# Altium PCB 7Seg LED Display Driver.PcbDoc
Units mm, origin at the board's own origin, x right, y up, seen from the top; angles counter-clockwise.
Board outline 152.4 x 101.6 mm, 2 copper layers (Top Layer, Bottom Layer); 17 components, 33 nets, 86 pads, 9 vias.
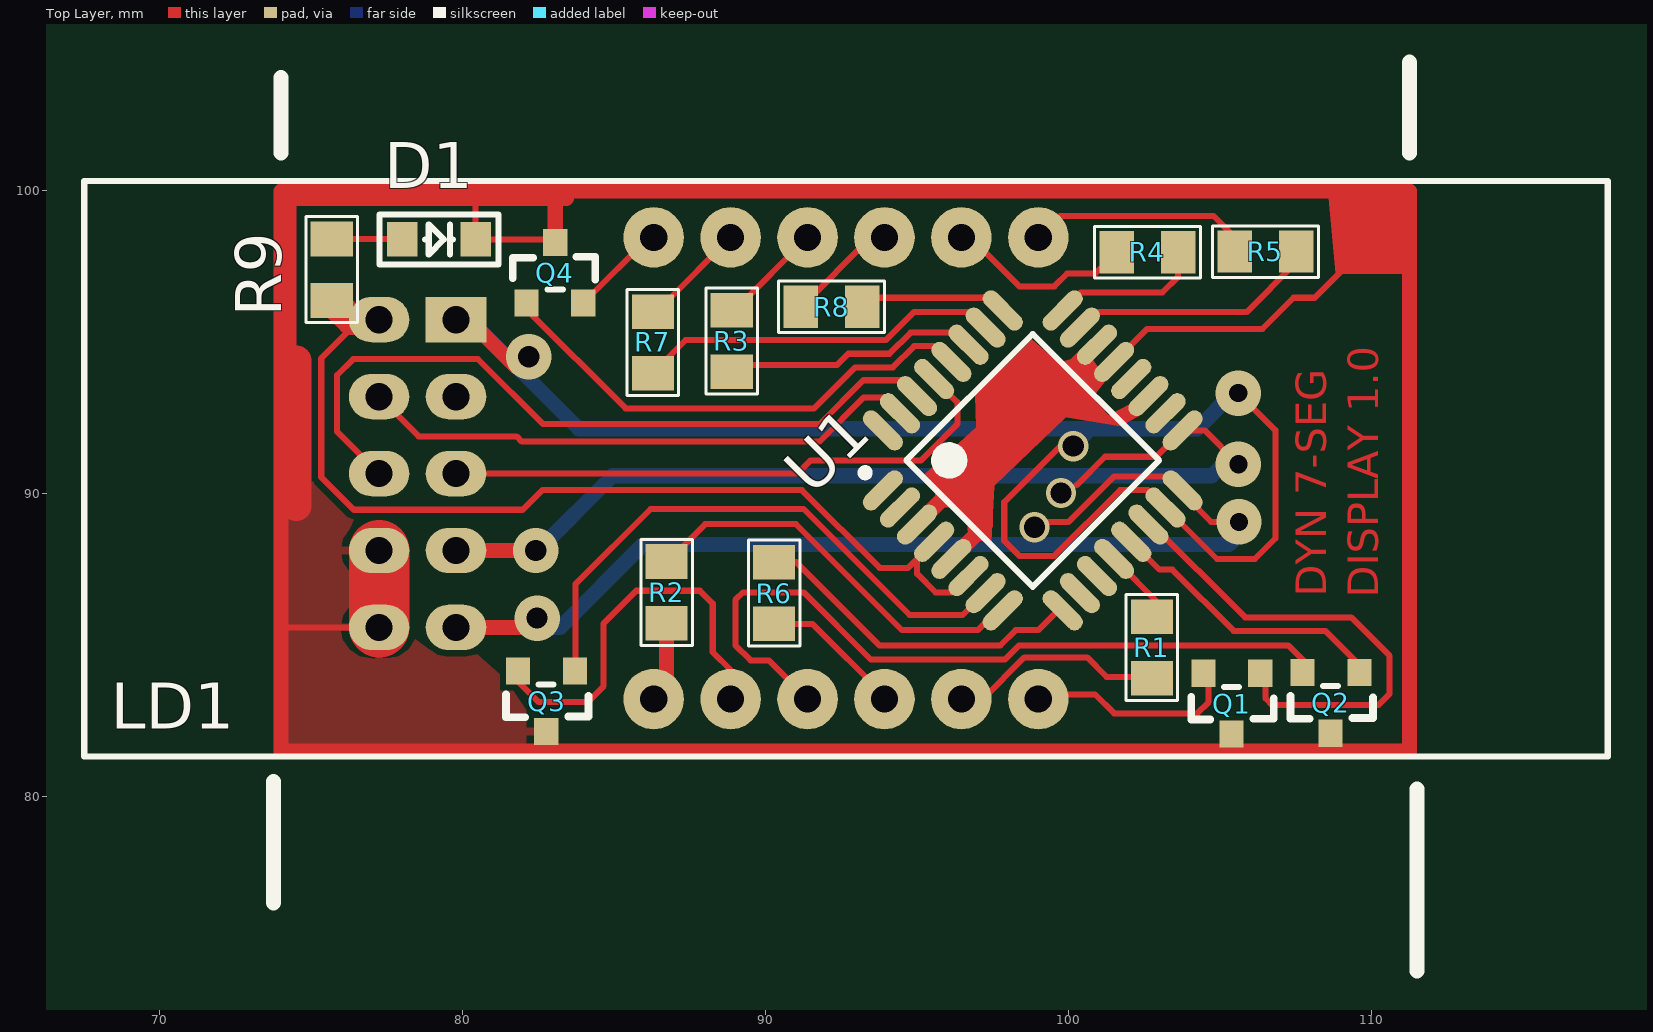
[diagram p0: Top Layer view]
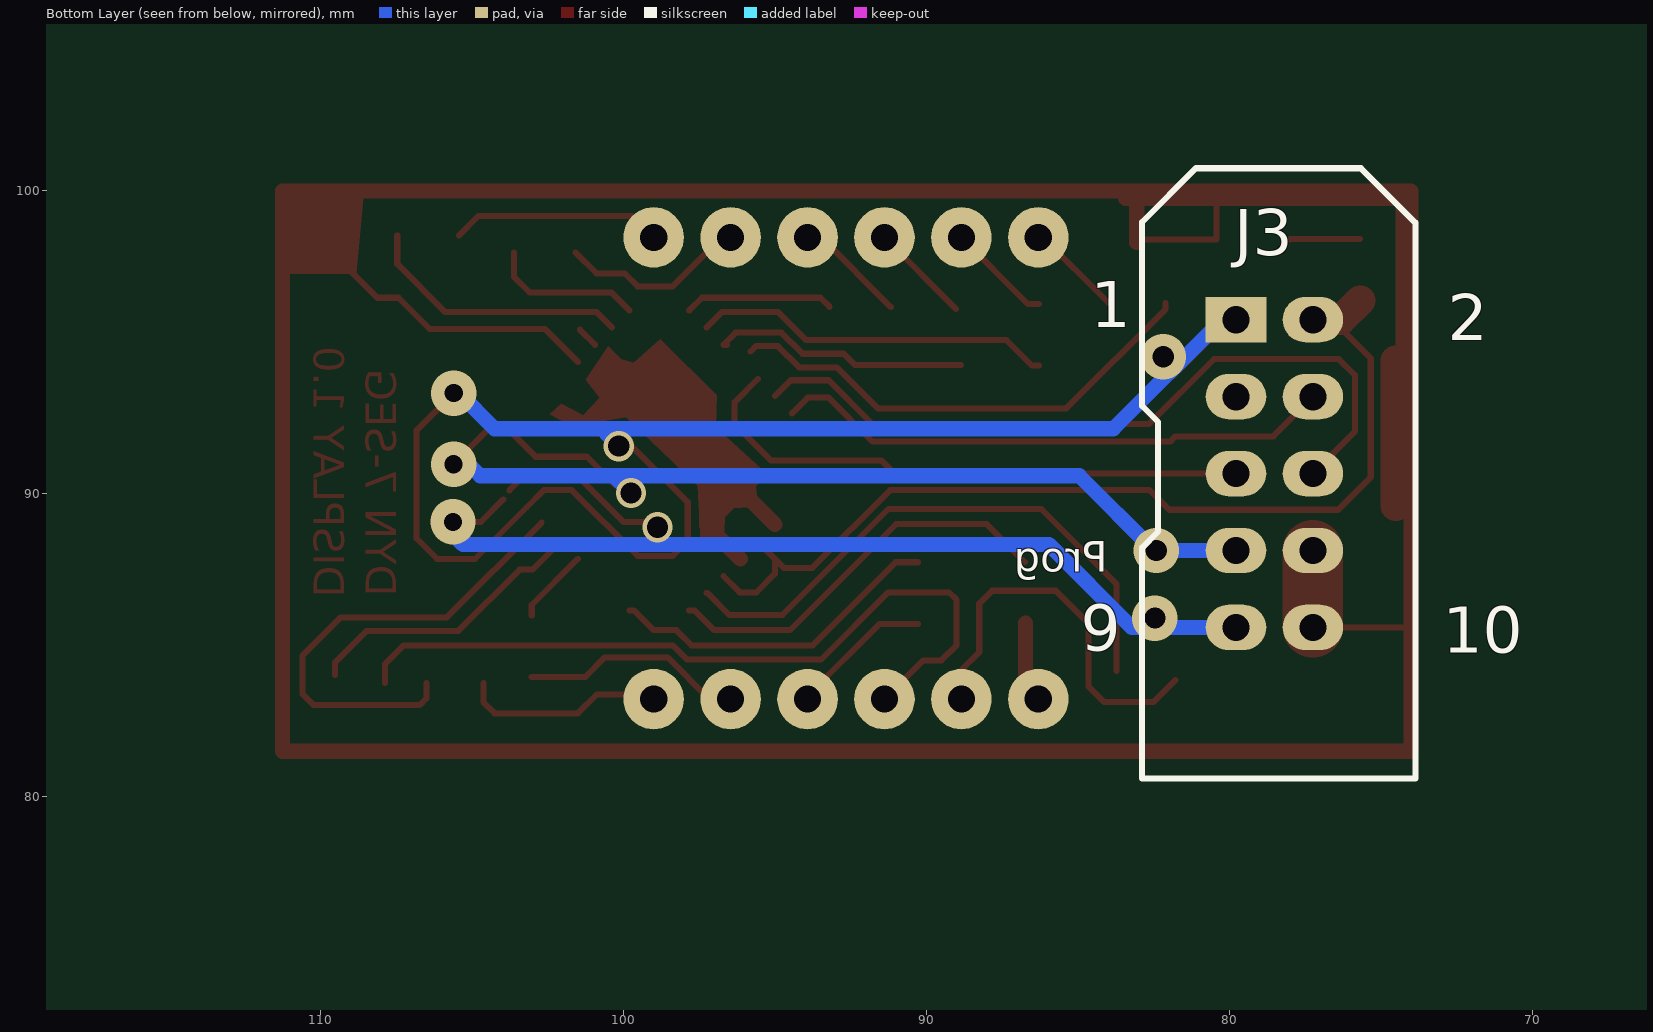
[diagram p1: Bottom Layer view, seen from below]
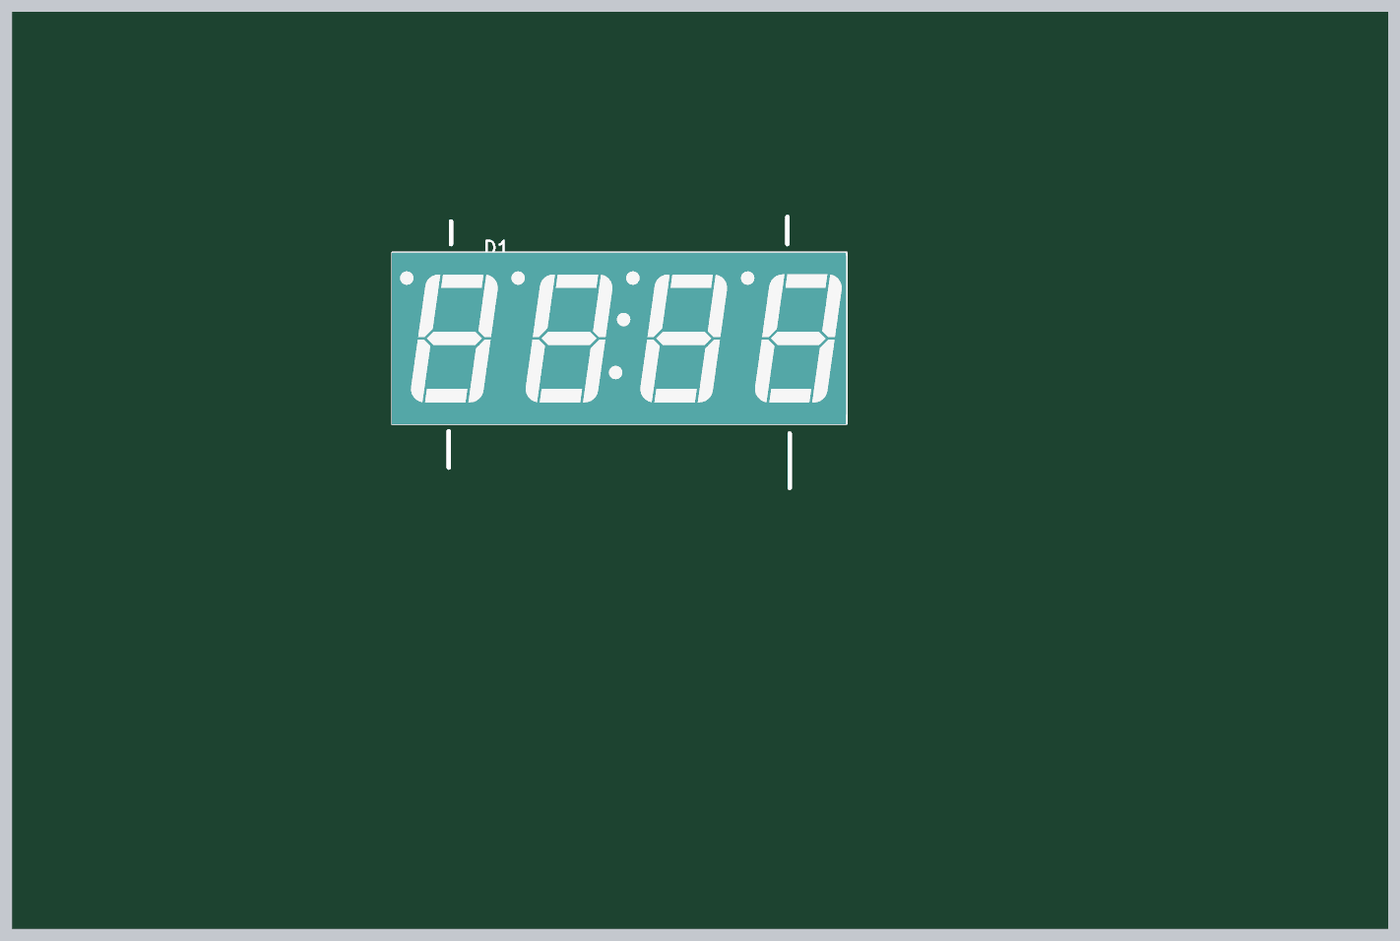
[diagram p2: 3D render of the assembled board from above, using the file's embedded part models]

## Layer stack, top to bottom
Top Solder: solder mask 0.0102, Solder Resist, Dk 3.5
Top Layer: signal copper 0.0356
Dielectric 1: dielectric 0.32, FR-4, Dk 4.8
Bottom Layer: signal copper 0.0356
Bottom Solder: solder mask 0.0102, Solder Resist, Dk 3.5

## Board outline
25.4,25.4 177.8,25.4 177.8,127 25.4,127

## Design rules (kind name [scope] priority, off if disabled: settings)
Clearance [All] p1: gap=0.2
ComponentClearance ComponentClearance_1 [InComponent('LD1') vs InComponent('J1')] p1: gap=0 collisioncheckmode=3 verticalgap=0 showdistances=FALSE
ComponentClearance [All] p2 off: gap=0.2 collisioncheckmode=3 verticalgap=0.2 showdistances=FALSE
PolygonConnect [All] p1: connectstyle=Relief reliefconductorwidth=0.254 reliefentries=4 polygonreliefangle="90 Angle" airgapwidth=0.254
RoutingCorners [All] p1: cornerstyle=45-Degree minsetback=0.1 maxsetback=0.1
RoutingVias [All] p1: holewidth=0.711 width=1.27 viastyle="Through Hole" minholewidth=0.711 minwidth=1.27 maxholewidth=0.711 maxwidth=1.27
SolderMaskExpansion [All] p1: expansion=0.102
Width [All] p1: maxlimit=2 minlimit=0.2 preferedwidth=0.5
27 further rules are at their usual default settings.

## Components (designator, comment, footprint, x,y, rotation, side; value= is the part's Value field where it differs from the comment)
D1 "Green" "LED SMD 0805 Green" 78,98.4 r0 top
J3 "IDC10 M" "LINE 2.54 x 10D (2 x 5) - BH" 79.775,95.75 r180 bottom
LD1 "Name" "7 seg, Dyn, 4 Digit" 99,83.225 r180 top
Q1 "BSS138" SOT-23 106.325,84.075 r180 top
Q2 "BSS138" SOT-23 109.6,84.1 r180 top
Q3 "BSS138" SOT-23 83.7,84.15 r180 top
Q4 "BSS138" SOT-23 82.1,96.3 r0 top
R1 ">100 Om" "SMD 0805 (2012)" 102.725,85.95 r270 top
R2 ">100 Om" "SMD 0805 (2012)" 86.7,87.775 r270 top
R3 ">100 Om" "SMD 0805 (2012)" 88.9,94.025 r90 top
R4 ">100 Om" "SMD 0805 (2012)" 103.625,98 r180 top
R5 ">100 Om" "SMD 0805 (2012)" 107.525,98.025 r180 top
R6 ">100 Om" "SMD 0805 (2012)" 90.25,87.75 r270 top
R7 ">100 Om" "SMD 0805 (2012)" 86.3,93.975 r90 top
R8 ">100 Om" "SMD 0805 (2012)" 93.2,96.2 r180 top
R9 "2.2k Om" "SMD 0805 (2012)" 75.7,96.375 r90 top
U1 "ATmega8A-AU" 32A_N 98.815,91.105 r45 top

## Footprints (in the part's own frame and the unit in brackets; to place one, negate y for a bottom-side part, rotate by r counter-clockwise, add the part's x,y. Pads: shape width x height; smd on the part's side, far side on the other; paste and mask are expansions set on the pad)
"7 seg, Dyn, 4 Digit" [mm] "7 Seg, 3 Digits, Dynamic"
  round 2 hole 0.9: A(2.54,0) B(12.7,0) C(7.62,-15.24) D(2.54,-15.24) D1(0,0) D2(7.62,0) D3(10.16,0) D4(12.7,-15.24) DP(5.08,-15.24) E(0,-15.24) F(5.08,0) G(10.16,-15.24)
  silkscreen extent -18.8,-17.1 31.5,1.9, body extent -18.77,-17.07 31.53,1.93, height 8
32A_N [mm] "Thin QFP, 32-Leads, Body 7x7mm, Pitch 0.8mm, IPC Medium Density"
  oval 1.65x0.55 smd: 1(-4.2,2.8) 2(-4.2,2) 3(-4.2,1.2) 4(-4.2,0.4) 5(-4.2,-0.4) 6(-4.2,-1.2) 7(-4.2,-2) 8(-4.2,-2.8) 17(4.2,-2.8) 18(4.2,-2) 19(4.2,-1.2) 20(4.2,-0.4) 21(4.2,0.4) 22(4.2,1.2) 23(4.2,2) 24(4.2,2.8)
  oval 0.55x1.65 smd: 9(-2.8,-4.2) 10(-2,-4.2) 11(-1.2,-4.2) 12(-0.4,-4.2) 13(0.4,-4.2) 14(1.2,-4.2) 15(2,-4.2) 16(2.8,-4.2) 25(2.8,4.2) 26(2,4.2) 27(1.2,4.2) 28(0.4,4.2) 29(-0.4,4.2) 30(-1.2,4.2) 31(-2,4.2) 32(-2.8,4.2)
  silkscreen extent -4.32,-2.95 2.95,3.75, body extent -3.5,-3.5 3.5,3.5, height 1.2
"LED SMD 0805 Green" [mm]
  rect 1x1.143 smd: A(0,0) K(2.425,0)
  silkscreen extent -0.75,-0.82 3.17,0.83, body extent 0.22,-0.62 2.24,0.63, height 1.1
"LINE 2.54 x 10D (2 x 5) - BH" [mm]
  rect 2x1.5 hole 0.9: 1(0,0)
  oval 2x1.5 hole 0.9: 2(2.54,0) 3(0,-2.54) 4(2.54,-2.54) 5(0,-5.08) 6(2.54,-5.08) 7(0,-7.62) 8(2.54,-7.62) 9(0,-10.16) 10(2.54,-10.16)
  silkscreen extent -3.1,-15.15 5.92,5, body extent -3.18,-15.25 6.02,5.11, height 8.84
"SMD 0805 (2012)" [mil]
  rect 45x55 smd: 1(0.35,0.98) 2(80.35,0.98)
  silkscreen extent -29,-32 109,34, body extent 1,-24 80,26, height 18
SOT-23 [mm]
  rect 0.8x0.9 smd: 1(0,0) 2(1.875,0) 3(0.95,2)
  silkscreen extent -0.45,0.45 2.27,1.53, body extent -0.57,-0.32 2.43,2.32, height 1.08

## Part data
D1: library part "Led SMD 0805 Green", "?2v ?20mA"
J3: library part "PLD-10 (2 x 5)", "Vert, Dbl line, Male"
LD1: library part "7 Seg, 4 dig, Dynamic", "Dynamic Common Catode/Anode 4 Digits Display"
Q1 Q2 Q3 Q4: "N-Channel 50V - 0.7-1? - 0.22A"
R1 R2 R3 R4 R5 R6 R7 R8 R9: library part "Res All Types"
U1: "8-bit AVR Microcontroller, 8KB Flash, 512 Bytes EEPROM, 1KB SRAM, 32-pin TQFP, Industrial Grade (-40°C to 85°C)"

## Via types
v1: diameter 1, hole 0.7, Top Layer to Bottom Layer, 3 vias
v2: diameter 1.5, hole 0.7, Top Layer to Bottom Layer, 3 vias
v3: diameter 1.5, hole 0.6, Top Layer to Bottom Layer, 3 vias

## Nets (pads, with @x,y where several pads share a name; then routed paths per layer and width w, separated by ;. In a path a pad name is that pad's centre, name@x,y a point inside that pad or via, vN(x,y) a via of type N, cw(c..) or ccw(c..) an arc to the next point about the centre after c; other vN are vias at no path point)
A: LD1.A R1.2 | length 7.7
  Top Layer w0.2: LD1.A@96.025,83.225 LD1.A@96.025,83.475 ; LD1.A 97.162,83.225 98.537,84.6 100.609,84.6 101.25,83.959 R1.2@103.025,83.959
B: LD1.B R2.2 | length 2.7
  Top Layer w0.5: LD1.B 86.725,83.65 R2.2
C: LD1.C R3.2 | length 3.3
  Top Layer w0.2: R3.2@89.015,96.1 LD1.C
D: LD1.D R4.2 | length 6.2
  Top Layer w0.2: LD1.D@96.5,98.5 96.725,98.5 98.375,96.85 99.525,96.85 99.95,97.275 100.884,97.275 R4.2
D1: LD1.D1 Q1.2 | length 6.5
  Top Layer w0.2: LD1.D1@99.15,83.375 100.875,83.375 101.5,82.75 104.25,82.75 104.625,83.125 Q1.2@104.625,83.75
D2: LD1.D2 Q2.2 | length 25.6
  Top Layer w0.2: LD1.D2 90.105,84.5 89.5,84.5 89,85 89,86.5 89.25,86.75 91.25,86.75 93.475,84.525 97.896,84.525 98.371,85 107.25,85 107.875,84.375 Q2.2@107.875,83.75
D3: LD1.D3 Q3.2 | length 13.1
  Top Layer w0.2: Q3.2@81.775,83.85 82.5,83.125 84.125,83.125 84.65,83.65 84.65,85.725 85.725,86.8 87.825,86.8 88.25,86.375 88.25,84.775 88.84,84.185 LD1.D3
D4: LD1.D4 Q4.2 | length 3.4
  Top Layer w0.2: Q4.2 86.2,98.525 86.2,98.365 LD1.D4
DON1: Q1.1 U1.14 | length 15.8
  Top Layer w0.2: U1.14@102.7,89.05 105.825,85.925 109.325,85.925 110.6,84.65 110.6,83.4 110.225,83.025 106.725,83.025 106.5,83.25 Q1.1@106.5,83.75
DON2: Q2.1 U1.13 | length 9.5
  Top Layer w0.2: U1.13@102.075,88.425 103,87.5 103.425,87.5 105.45,85.475 108.475,85.475 109.525,84.425 Q2.1@109.525,84.025
DON3: Q3.1 U1.7 | length 19.2
  Top Layer w0.2: Q3.1@83.725,84.15 83.725,87.025 86.2,89.5 91.25,89.5 94.75,86 96.5,86 97.221,86.721 U1.7
DON4: Q4.1 U1.28 | length 16.2
  Top Layer w0.2: Q4.1 82.1,96.1 85.375,92.825 91.6,92.825 92.95,94.175 94.2,94.175 94.9,94.875 95.625,94.875 U1.28@95.8,94.7
DP: LD1.DP R8.2 | length 3.2
  Top Layer w0.2: R8.2@91.167,96.167 LD1.DP@93.465,98.465
E: LD1.E R5.2 | length 7
  Top Layer w0.2: LD1.E 99.71,99.175 104.784,99.175 R5.2@105.434,98.525
F: LD1.F R6.2 | length 4.7
  Top Layer w0.2: R6.2 91.541,85.709 93.92,83.33 LD1.F
G: LD1.G R7.2 | length 3.5
  Top Layer w0.2: R7.2@86.275,96.266 86.641,96.266 LD1.G
GND: D1.K J3.8 J3.10 Q1.3 Q2.3 Q3.3 Q4.3 U1.3 U1.5 U1.19 U1.21 U1.22 | length 159
  Top Layer w0.2: 74.11,85.59 J3.10 ; 80.425,99.725 D1.K Q4.3@82.95,98.4 ; U1.3@94.984,88.984 U1.3 ; U1.22 U1.22@101.438,95.425 ; U1.21 102.594,95.45 106.4,95.45 107.425,96.475 108.125,96.475 109.625,97.975 111.1,97.975
  Top Layer w0.5: 74,99.875 74,100 ; 74.25,94.2 74.25,99.75 83.425,99.75 ; Q4.3 83.05,99.725 ; U1.3 96.088,90.075 96.725,90.075 97.25,89.55 97.25,88.974 U1.5 ; 74,100 111.25,100 111.25,81.5 74,81.5 74,100
  Top Layer w1: 74.5,89.6 74.5,94.4
  Top Layer w2: J3.10 J3.8
MISO: J3.9 U1.16 | length 37
  Top Layer w0.2: v1@98.725,89.075 99.35,89.075 100,89.075 101.5,90.575 103.305,90.575 U1.16 ; U1.16@103.96,89.815 104.7,89.075 v3(105.625,89.075)
  Top Layer w0.5: J3.9 v2@81.86,85.59
  Bottom Layer w0.5: J3.9 83.215,85.59 85.95,88.325 105.3,88.325 v3@105.6,88.625
  other v1: 98.875,88.9
  other v2: 82.45,85.9
MOSI: J3.1 U1.15 | length 51.3
  Top Layer w0.2: v1(100.15,91.575) 99.725,91.575 97.875,89.725 97.875,88.45 98.375,87.95 99.525,87.95 101.7,90.125 102.623,90.125 U1.15 104.898,87.85 106.15,87.85 106.825,88.525 106.825,92.1 v3(105.6,93.325)
  Top Layer w0.5: J3.1@80.2,95.75 v2@81.737,94.212
  Bottom Layer w0.5: J3.1 80.225,95.75 83.825,92.15 104.25,92.15 v3@105.425,93.325 ; v1(100.15,91.575) 100.55,91.975
  other v2: 82.175,94.525
NetD1_A: D1.A R9.2 | length 2.3
  Top Layer w0.2: R9.2 77.984,98.416 D1.A
RESET: J3.5 U1.29 | length 19
  Top Layer w0.2: J3.5 91.045,90.67 91.475,91.1 95.125,91.1 96.325,92.3 96.325,93.029 U1.29
RXD: J3.6 U1.30 | length 24.9
  Top Layer w0.2: J3.6 75.85,92.055 75.85,93.925 76.375,94.45 80.5,94.45 82.65,92.3 91.775,92.3 93.225,93.75 94.473,93.75 U1.30
SCK: J3.7 U1.17 | length 37
  Top Layer w0.2: 100.263,90.288 101.2,91.225 102.895,91.225 U1.17 104.49,92.095 v3(105.605,90.979)
  Top Layer w0.5: J3.7 v2(82.405,88.13)
  Bottom Layer w0.5: J3.7 82.48,88.13 84.95,90.6 100.3,90.6 ; v1(99.75,90.025) 100.325,90.6 104.725,90.6 105.104,90.979 v3(105.605,90.979)
SEGA: R1.1 U1.12 | length 2.5
  Top Layer w0.2: U1.12 103.025,86.329 R1.1@103.025,85.991
SEGB: R2.1 U1.8 | length 13.3
  Top Layer w0.2: R2.1@86.746,87.745 88,89 91,89 94.5,85.5 97,85.5 97.655,86.155 U1.8
SEGC: R3.1 U1.27 | length 8.6
  Top Layer w0.2: R3.1@88.85,94.25 92.35,94.25 92.725,94.625 94.084,94.625 94.784,95.325 96.292,95.325 U1.27 U1.27@96.577,94.923
SEGD: R4.1 U1.24 | length 5.1
  Top Layer w0.2: U1.24 100.4,96.65 103.1,96.65 103.616,97.166 R4.1
SEGDP: R8.1 U1.25 | length 4.9
  Top Layer w0.2: R8.1 93.491,96.475 97.405,96.475 U1.25
SEGE: R5.1 U1.23 | length 8.9
  Top Layer w0.2: U1.23 100.882,96 105.875,96 107.466,97.591 R5.1@107.466,98.525
SEGF: R6.1 U1.9 | length 11.1
  Top Layer w0.2: R6.1 91.009,87.741 93.75,85 97.75,85 98.25,85.5 99,85.5 99.655,86.155 U1.9
SEGG: R7.1 U1.26 | length 11.9
  Top Layer w0.2: R7.1@86.275,94.234 86.509,94.234 87.35,95.075 93.967,95.075 94.892,96 96.748,96 U1.26
TXD: J3.4 U1.31 | length 18.6
  Top Layer w0.2: J3.4 78.545,91.9 81.775,91.9 81.95,91.725 91.775,91.725 93.225,93.175 93.917,93.175 U1.31
VCC: J3.2 R9.1 U1.4 U1.6 | length 32.6
  Top Layer w0.2: J3.2@76.6,95.75 75.325,94.475 75.325,90.55 76.4,89.475 81.975,89.475 82.625,90.125 91.191,90.125 93.76,87.556 94.7,87.556 U1.4@95,87.856 ; U1.4 U1.4@95,87.856 ; U1.6 96.157,86.75 95.606,86.75 95,87.356 U1.4@95,87.856
  Top Layer w1: R9.1 76.309,95.75 76.6,95.75 J3.2
pads on no net: J3.3 U1.1 U1.2 U1.10 U1.11 U1.18 U1.20 U1.32

## Polygon pours and split planes (outlines as drawn)
GND on Top Layer "Top Layer-No Net" (solid, pour order 2): 74.075,100.05 111.325,100.05 111.325,81.55 74.075,81.55

## Other copper
Top Layer:
  region net GND: 108.6,99.975 108.575,99.95 108.825,97.275 111.2,97.275 111.25,97.225 111.25,100
  region net GND: 100.5,94.875 100.075,94.45 99.65,94.325 98.775,95.1 96.925,93.25 96.95,92.2 95.25,90.65 95.625,90.25 95.575,89.825 95.85,89.55 96.35,89.525 96.65,89.225 96.675,88.775 97.05,88.45 97.45,88.425 97.55,90.275 99.9,92.525 101.7,92.225 102.425,92.625 102.05,92.975 101.325,92.6 100.775,93.175 101.25,93.775
  text "DYN 7-SEG" at 108.5,86.6 h1 r90
  text "DISPLAY 1.0" at 110.225,86.575 h1 r90

## Silkscreen, mask and mechanical layers (free items; w line width, h text height)
Top Overlay:
  lines w0.5: 73.75,76.5 73.75,80.5 ; 74,101.25 74,103.75 ; 111.25,101.25 111.25,104.25 ; 111.5,74.25 111.5,80.25
Bottom Overlay:
  text "Prog" at 84,87.425 h1

## Text inside footprints (layer, text, board x,y; h text height)
J3: Bottom Overlay "10" at 72.95,84.75 h1.52; Bottom Overlay "9" at 84.9,84.825 h1.52; Bottom Overlay "2" at 72.775,95.075 h1.52; Bottom Overlay "1" at 84.575,95.5 h1.52